# Altium PCB PCB1.PcbDoc
Units mm, origin at the board's own origin, x right, y up, seen from the top; angles counter-clockwise.
Board outline 87.46 x 36.45 mm, 2 copper layers (Top Layer, Bottom Layer); 50 components, 32 nets, 114 pads, 0 vias.
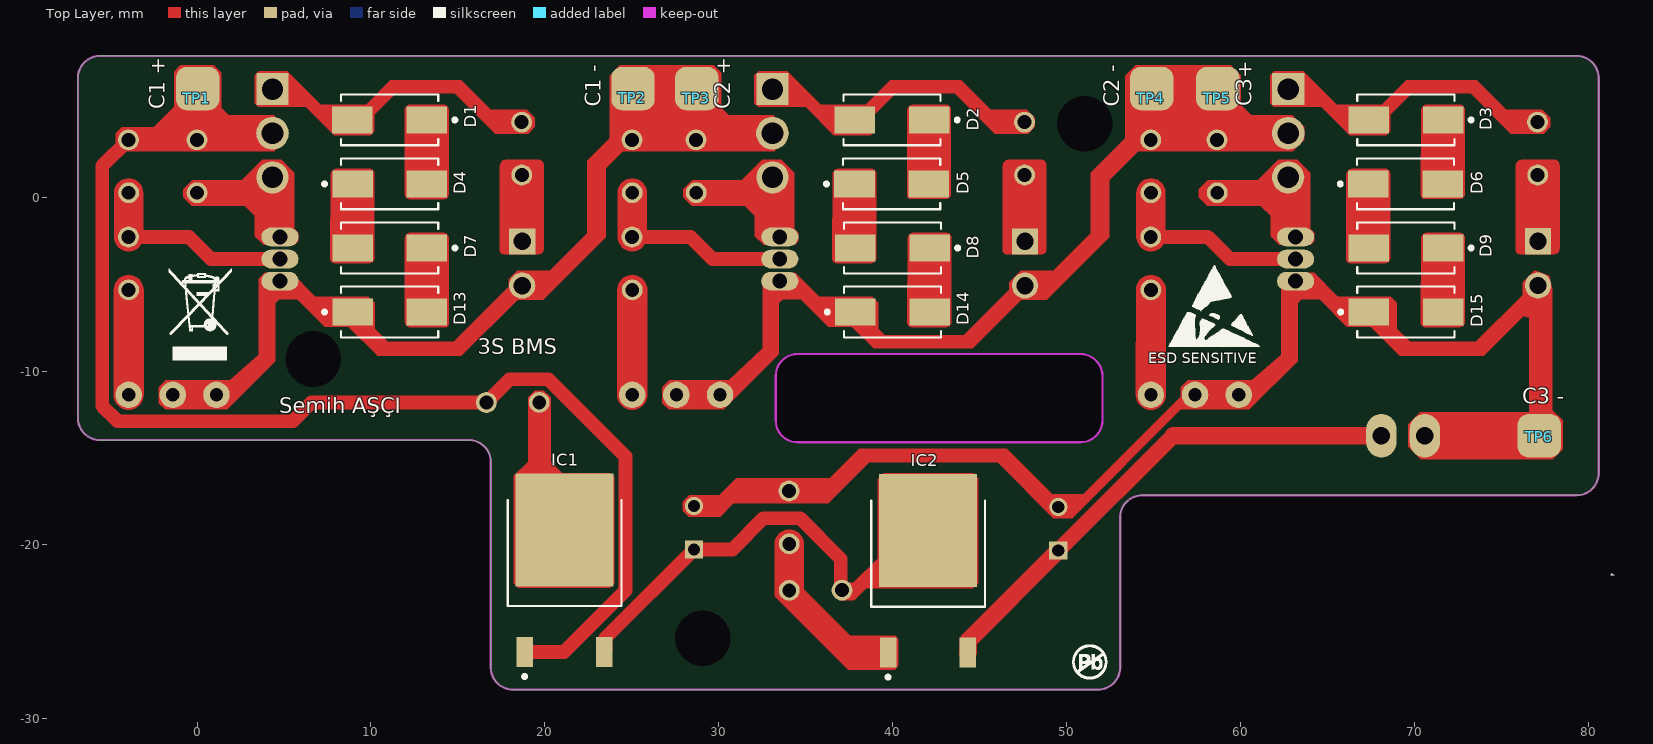
[diagram p0: Top Layer view]
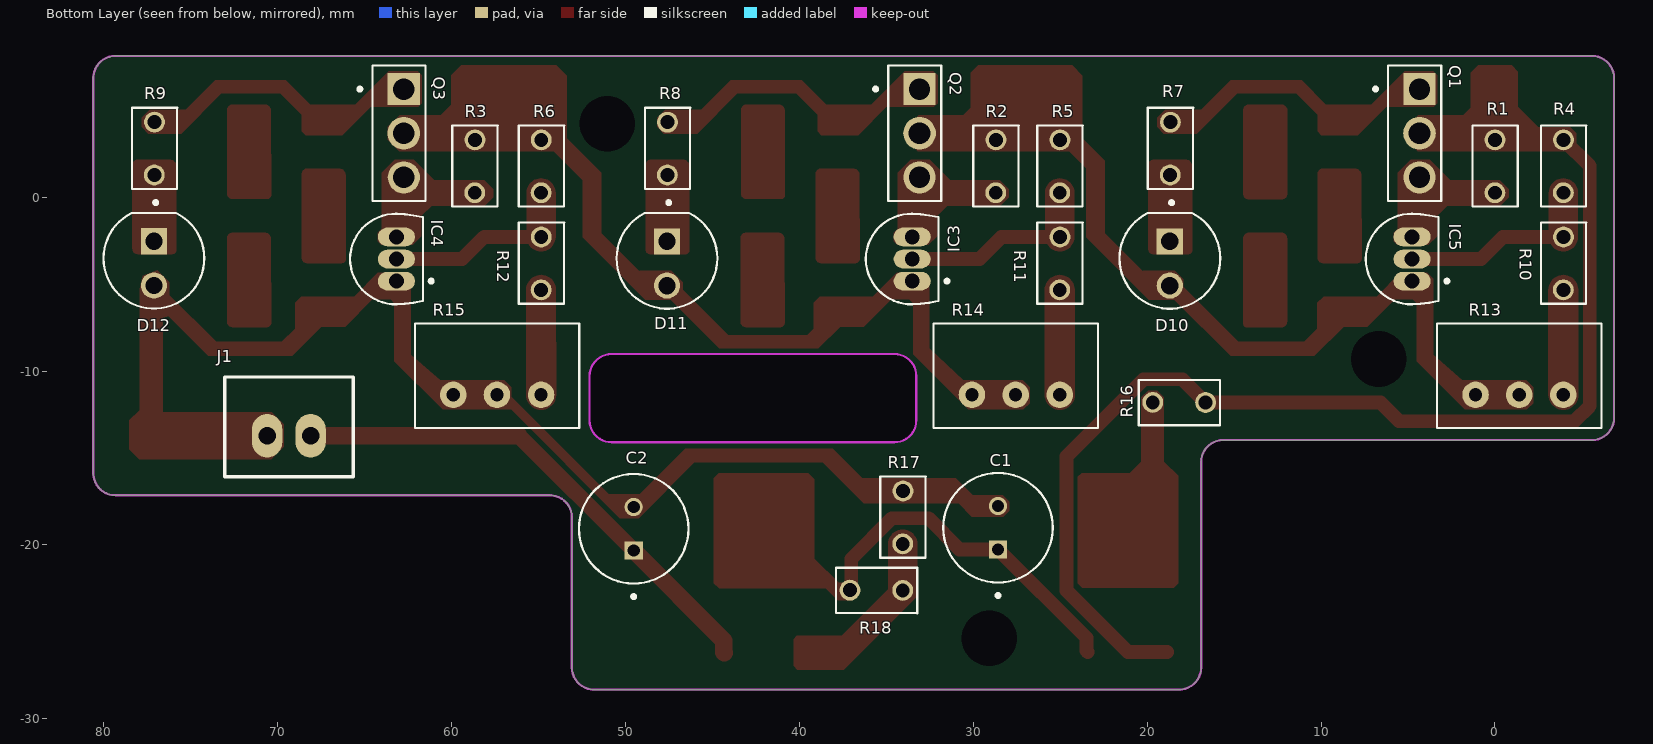
[diagram p1: Bottom Layer view, seen from below]
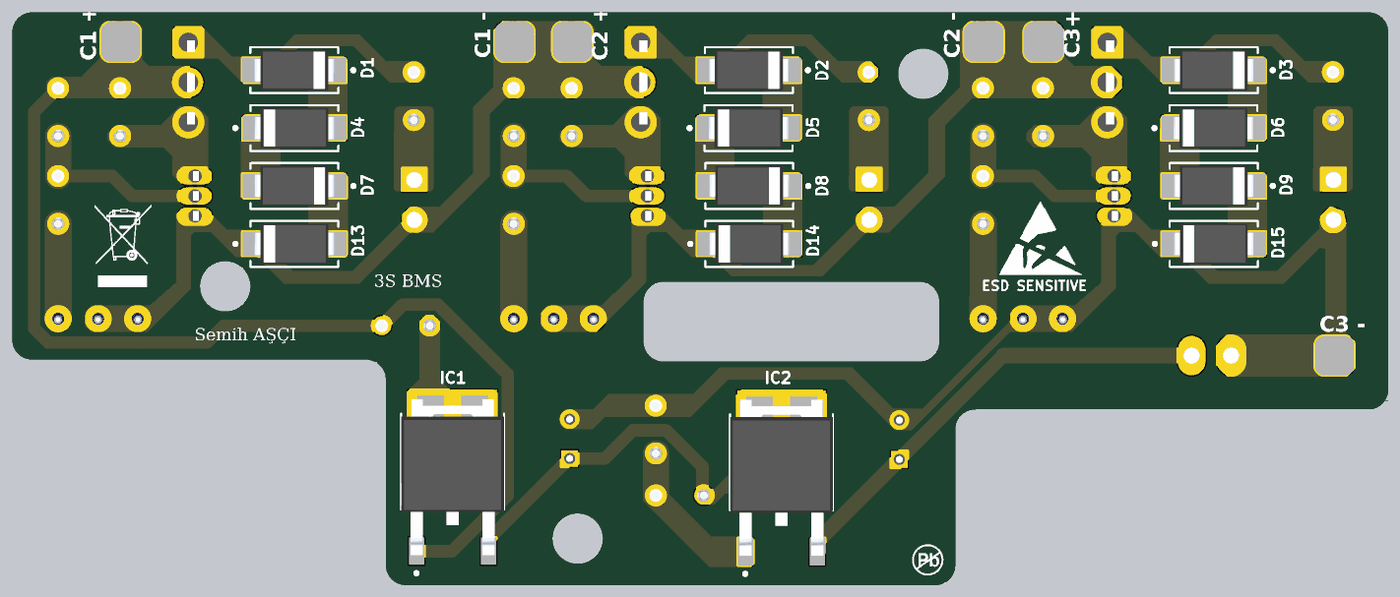
[diagram p2: 3D render of the assembled board from above, using the file's embedded part models]
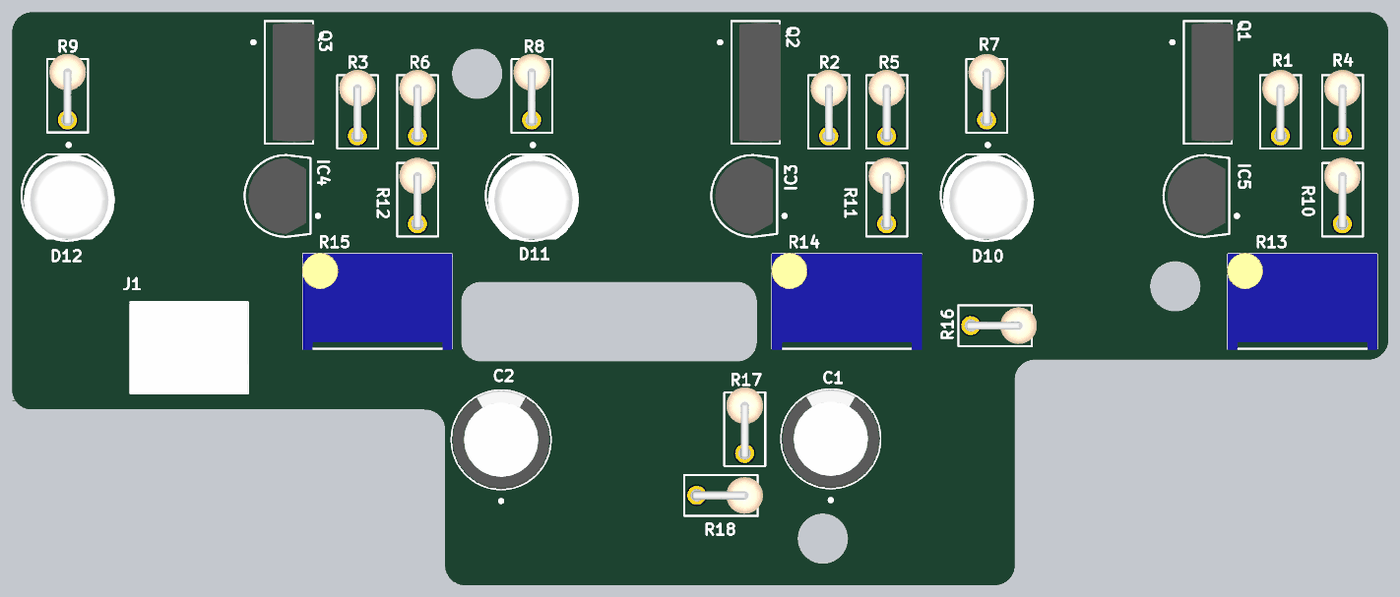
[diagram p3: 3D render of the assembled board from below, using the file's embedded part models]

## Layer stack, top to bottom
Top Solder: solder mask 0.0102, Solder Resist, Dk 3.5
Top Layer: signal copper 0.0356
Dielectric 1: dielectric 0.32, FR-4, Dk 4.8
Bottom Layer: signal copper 0.0356
Bottom Solder: solder mask 0.0102, Solder Resist, Dk 3.5

## Board outline
16.891,-27.051 16.891,-15.24 ccw(c15.621,-15.24) 15.621,-13.97 -5.588,-13.97 cw(c-5.588,-12.7) -6.858,-12.7 -6.858,6.858 cw(c-5.588,6.858) -5.588,8.128 79.337,8.128 cw(c79.337,6.858) 80.607,6.858 80.607,-15.875 cw(c79.337,-15.875) 79.337,-17.145 54.356,-17.145 ccw(c54.356,-18.415) 53.086,-18.415 53.086,-27.051 cw(c51.816,-27.051) 51.816,-28.321 22.733,-28.321 18.161,-28.321 cw(c18.161,-27.051)
cut-out: 50.8,-9.017 cw(c50.8,-10.287) 52.07,-10.287 52.07,-12.827 cw(c50.8,-12.827) 50.8,-14.097 34.544,-14.097 cw(c34.544,-12.827) 33.274,-12.827 33.274,-10.287 cw(c34.544,-10.287) 34.544,-9.017

## Design rules (kind name [scope] priority, off if disabled: settings)
Clearance [All] p1: gap=0.254 ignorepadtopadclearanceinfootprint=FALSE except(0: Arc-Hole Track-Hole SMDPad-Hole THPad-Hole Via-Hole Fill-Hole Poly-Hole Region-Hole Text-Hole)
PolygonConnect [All] p1: connectstyle=Relief reliefconductorwidth=0.254 reliefentries=4 polygonreliefangle="90 Angle" airgapwidth=0.254
RoutingVias [All] p1: holewidth=0.711 width=1.27 viastyle="Through Hole" minholewidth=0.711 minwidth=1.27 maxholewidth=0.711 maxwidth=1.27
SolderMaskExpansion [All] p1: expansion=0.102 istentingtop=FALSE
Width [All] p1: maxlimit=50 minlimit=0.254 preferedwidth=0.254 minimp=50.000000 maximp=50.000000 favimp=50.000000
30 further rules are at their usual default settings.

## Components (designator, comment, footprint, x,y, rotation, side; value= is the part's Value field where it differs from the comment)
C1 "493-15610-ND" AL_ELEC_CAP_RAD 28.575,-19.01 r90 bottom
C2 "493-15610-ND" AL_ELEC_CAP_RAD 49.53,-19.07 r90 bottom
D1 "1N4007 SMD" DO-214AC 11.07,4.445 r180 top
D2 "1N4007 SMD" DO-214AC 39.967,4.445 r180 top
D3 "1N4007 SMD" DO-214AC 69.52,4.445 r180 top
D4 "1N4007 SMD" DO-214AC 11.078,0.762 r0 top
D5 "1N4007 SMD" DO-214AC 39.943,0.762 r0 top
D6 "1N4007 SMD" DO-214AC 69.496,0.762 r0 top
D7 "1N4007 SMD" DO-214AC 11.078,-2.921 r180 top
D8 "1N4007 SMD" DO-214AC 39.991,-2.921 r180 top
D9 "1N4007 SMD" DO-214AC 69.52,-2.921 r180 top
D10 "LED TH" TH_LED 18.694,-3.814 r270 bottom
D11 "LED TH" TH_LED 47.614,-3.814 r270 bottom
D12 "LED TH" TH_LED 77.12,-3.809 r270 bottom
D13 "1N4007 SMD" DO-214AC 11.078,-6.604 r0 top
D14 "1N4007 SMD" DO-214AC 39.991,-6.604 r0 top
D15 "1N4007 SMD" DO-214AC 69.52,-6.604 r0 top
IC1 "497-1574-2-ND" TO-252-3 21.133,-21.459 r90 top
IC2 "497-1574-2-ND" TO-252-3 42.037,-21.497 r90 top
IC3 "TL431" TO92-3 34.088,-3.556 r90 bottom
IC4 "TL431" TO92-3 63.75,-3.556 r90 bottom
IC5 "TL431" TO92-3 5.335,-3.556 r90 bottom
J1 "B2B-XH-A(LF)(SN)" "JST XH B2B-XH-A" 69.362,-13.716 r0 bottom
Q1 "BD140" "TO126 (SOT32)" 4.641,3.679 r270 bottom
Q2 "BD140" "TO126 (SOT32)" 33.394,3.679 r270 bottom
Q3 "BD140" "TO126 (SOT32)" 63.055,3.679 r270 bottom
R1 "RES 1K OHM TH" TH_RES -0.005,1.778 r90 bottom
R2 "RES 1K OHM TH" TH_RES 28.702,1.778 r90 bottom
R3 "RES 1K OHM TH" TH_RES 58.664,1.778 r90 bottom
R4 "RES 20K OHM TH" TH_RES -3.942,1.778 r90 bottom
R5 "RES 20K OHM TH" TH_RES 25.019,1.778 r90 bottom
R6 "RES 20K OHM TH" TH_RES 54.849,1.778 r90 bottom
R7 "RES 330R OHM TH" TH_RES 18.669,2.794 r90 bottom
R8 "RES 330R OHM TH" TH_RES 47.59,2.794 r90 bottom
R9 "RES 330R OHM TH" TH_RES 77.095,2.799 r90 bottom
R10 "RES 20K OHM TH" TH_RES -3.942,-3.81 r90 bottom
R11 "RES 20K OHM TH" TH_RES 25.019,-3.81 r90 bottom
R12 "RES 20K OHM TH" TH_RES 54.849,-3.81 r90 bottom
R13 "TRIMPOT" Trimpot_tube -1.407,-10.287 r180 bottom
R14 "TRIMPOT" Trimpot_tube 27.554,-10.287 r180 bottom
R15 "TRIMPOT" Trimpot_tube 57.384,-10.287 r180 bottom
R16 "RES 2R OHM TH" TH_RES 18.157,-11.806 r180 bottom
R17 "RES 4.7K OHM TH" TH_RES 34.049,-18.419 r90 bottom
R18 "RES 517R OHM TH" TH_RES 35.574,-22.606 r180 bottom
TP1 "TEST PAD" TEST_PAD -0.006,5.711 r90 top
TP2 "TEST PAD" TEST_PAD 25.028,5.73 r90 top
TP3 "TEST PAD" TEST_PAD 28.701,5.711 r90 top
TP4 "TEST PAD" TEST_PAD 54.858,5.711 r90 top
TP5 "TEST PAD" TEST_PAD 58.663,5.711 r90 top
TP6 "TEST PAD" TEST_PAD 77.207,-13.752 r90 top

## Footprints (in the part's own frame and the unit in brackets; to place one, negate y for a bottom-side part, rotate by r counter-clockwise, add the part's x,y. Pads: shape width x height; smd on the part's side, far side on the other; paste and mask are expansions set on the pad)
AL_ELEC_CAP_RAD [mm]
  rect 1.05x1.05 hole 0.7: 1(-1.25,0)
  round 1.05 hole 0.7: 2(1.25,0)
  silkscreen extent -4,-3.15 3.15,3.15, body extent -3.15,-3.15 3.15,3.15, height 7
DO-214AC [mm]
  rect 2.33x1.55 smd: A(2.135,0) C(-2.135,0)
  silkscreen extent -3.85,-1.46 2.8,1.46, body extent -2.57,-1.28 2.57,1.28, height 2.62
"JST XH B2B-XH-A" [mm]
  oval 1.75x2.5 hole 1: 1(-1.25,0) 2(1.25,0)
  silkscreen extent -3.7,-3.38 3.7,2.38, body extent -3.7,-3.37 3.7,2.38, height 7
TEST_PAD [mm]
  rrect50% 0.2x0.2 smd: 1(-0.015,0.004)
  Top Layer region: 0.025,0.522 0.335,0.434 0.485,0.284 0.485,0.204 0.535,0.154 0.535,-0.236 0.277,-0.494 0.025,-0.494
  Top Layer region: -0.015,-0.504 -0.325,-0.416 -0.475,-0.266 -0.475,-0.186 -0.525,-0.136 -0.525,0.254 -0.267,0.512 -0.015,0.512
  Top Layer lines w0.254: 0.025,0.522 cw(c0.025,0.014) 0.025,-0.494 0.025,0.522 ; 0.035,0.522 ccw(c0.035,0.014) 0.035,-0.494 0.035,0.522
TH_LED [mm]
  round 1.508 hole 1: 1(1.27,0)
  rect 1.508x1.508 hole 1: 2(-1.27,0)
  silkscreen extent -3.6,-2.9 2.6,2.9, body extent -2.9,-2.76 2.51,3.04, height 12.1
TH_RES [mm]
  round 1.2 hole 0.8: 1(-1.52,0.005) 2(1.52,-0.005)
  silkscreen extent -2.32,-1.32 2.35,1.3, body extent -1.78,-1.17 2.69,1.16, height 8.84
TO92-3 [mm]
  oval 1.07x2.14 hole 0.85: 1(-1.27,-0.575) 2(0,-0.575) 3(1.27,-0.575)
  silkscreen extent -2.61,-2.67 2.61,2.09, body extent -2.41,-1.84 2.41,1.84, height 5.34
"TO126 (SOT32)" [mm]
  rect 1.85x1.85 hole 1.23: 1(-2.54,0.305)
  round 1.88 hole 1.25: 2(0,0.305)
  round 1.85 hole 1.23: 3(2.54,0.305)
  silkscreen extent -3.9,-2.32 3.9,1.56, body extent -3.8,-1 3.8,1.65, height 13.2
TO-252-3 [mm]
  rect 1.73x0.96 smd: 1(-4.7,2.285) 3(-4.7,-2.285)
  rect 6.49x5.63 smd paste-4: 4(2.32,0)
  silkscreen extent -6.2,-3.27 4.04,3.27, body extent -4.95,-3.27 4.95,3.27, height 2.55
Trimpot_tube [mil]
  round 60 hole 30: 1(-99.21,-42.52) 2(-0.39,-42.52) 3(99.61,-42.52)
  silkscreen extent -186,-118 186,119, body extent -189,-120 188,122, height 455

## Part data
C1 C2: library part "CAP 100uF Radial TH", "Cap Aluminum Lytic 100uF 16V 20% (6.3 X 11mm) Radial 2.5mm 175mA 2000h 105 Bulk", Capacitance=100uF, Case/Package=Radial, Leakage Current=48uA, Manufacturer=Nichicon, Manufacturer Part Number=UPJ1C101MED, Max Operating Temperature=105°C, Min Operating Temperature=-55°C, Package Quantity=200, Ripple Current=175mA, Tolerance=20%, Voltage Rating=16V, Category="Aluminum Electrolytic Capacitors", ComponentLink1Description=https://datasheet.ciiva.com/30527/getdatasheetpartid-513226-30527124.pdf?src-supplier=Verical, ComponentLink1URL=https://datasheet.ciiva.com/30527/getdatasheetpartid-513226-30527124.pdf?src-supplier=Verical, ComponentLink2Description=https://datasheet.ciiva.com/109/e-pj-109367.pdf?src-supplier=Digi-Key, ComponentLink2URL=https://datasheet.ciiva.com/109/e-pj-109367.pdf?src-supplier=Digi-Key, ComponentLink3Description=https://datasheet.ciiva.com/11686/e-pj-11686584.pdf?src-supplier=Avnet, ComponentLink3URL=https://datasheet.ciiva.com/11686/e-pj-11686584.pdf?src-supplier=Avnet, ComponentLink4Description=https://datasheet.ciiva.com/16389/e-pj-16389048.pdf?src-supplier=Future+Electronics, ComponentLink4URL=https://datasheet.ciiva.com/16389/e-pj-16389048.pdf?src-supplier=Future+Electronics, Construction=RADIAL, Designed by="Semih AŞÇI", Diameter=6.3mm, Dissipation Factor=0.16%, Height=11mm, Height - Seated (Max)=0.472inch, Lead Diameter=0.5mm, Lead Free="Lead Free", Lead Pitch=2.5mm, Lead/Base Style=Straight, Length=16mm, Life (Hours)=2000Hour, Mount="Through Hole", Packaging=Bulk, Pricing 1="1=0,40000, 10=0,27700, 50=0,19360, 100=0,16590, 500=0,12446, 1000=0,10510, 2500=0,09957, 5000=0,09404 (USD)", Radiation Hardening=No, RoHS=Yes, RoHS Compliant=Yes, Series=PJ, Stock 1=86, Supplier 1=Digi-Key, Supplier Part Number 1=493-15610-ND, Termination=Radial, Voltage Rating (DC)=16V, Impedance=550mR
D1 D2 D3 D4 D5 D6 D7 D8 D9 D13 D14 D15: "VR=1000V IF=1A 15pF", Average Rectified Current=1A, Capacitance=15pF, Case/Package=DO-214AC, Forward Voltage=1.1V, Manufacturer="ON Semiconductor / Fairchild", Manufacturer Part Number=1N4007, Max Forward Surge Current (Ifsm)=30A, Max Operating Temperature=175°C, Max Repetitive Reverse Voltage (Vrrm)=1kV, Max Reverse Current=5uA, Min Operating Temperature=-65°C, Package Quantity=1000, Power Dissipation=3W, Supplier Part Number 1=1467514, Category="Rectifier Diodes", ComponentLink1Description=https://datasheet.ciiva.com/1239/1n4005-1239313.pdf?src-supplier=Newark, ComponentLink1URL=https://datasheet.ciiva.com/1239/1n4005-1239313.pdf?src-supplier=Newark, ComponentLink2Description=https://datasheet.ciiva.com/927/1n4001-d-927427.pdf?src-supplier=Digi-Key, ComponentLink2URL=https://datasheet.ciiva.com/927/1n4001-d-927427.pdf?src-supplier=Digi-Key, ComponentLink3Description=https://datasheet.ciiva.com/910/1n4001-910362.pdf?src-supplier=Digi-Key, ComponentLink3URL=https://datasheet.ciiva.com/910/1n4001-910362.pdf?src-supplier=Digi-Key, ComponentLink4Description=https://datasheet.ciiva.com/910/1n4001-910361.pdf?src-supplier=Digi-Key, ComponentLink4URL=https://datasheet.ciiva.com/910/1n4001-910361.pdf?src-supplier=Digi-Key, Contact Plating=Tin,Matte, Current Rating=1A, Diameter=2.72mm, Element Configuration=Single, Forward Current=1A, Height=5.2mm, Lead Free="Lead Free", Length=5.2mm, Max Reverse Voltage (DC)=1kV, Max Surge Current=30A, Number of Pins=2, Output Current=1A, Packaging="Tape and Reel", Peak Non-Repetitive Surge Current=30A, Polarity=Standard, Pricing 1="1=0,17200, 10=0,16000, 100=0,05560, 500=0,04900, 1000=0,03000, 2500=0,01440 (EUR)", Radiation Hardening=No, Reach SVHC Compliant="No SVHC", Reverse Voltage=1kV, RoHS=Yes, RoHS Compliant=Yes, Series=-, Supplier 1=Farnell, Voltage Rating (DC)=1kV, Weight=0.245g, Width=2.72mm
D10 D11 D12: "Radial red led", Designed by="Semih AŞÇI"
IC1 IC2: library part LM317, "Reg Standard Lin Adj Pos 1.2V to 37V 0.2A 3-Pin (2+Tab) DPAK T/R", Case/Package=TO-252, Manufacturer=STMicroelectronics, Manufacturer Part Number=LM317MDT-TR, Max Operating Temperature=125°C, Max Output Current=200mA, Max Output Voltage=37V, Max Input Voltage=40V, Min Operating Temperature=0°C, Min Output Voltage=1.2V, Min Input Voltage=4.2V, Output Current=500mA, Package Quantity=1, Power Supply Rejection Ratio (PSRR)=80dB, Reference Voltage=1.3V, Supplier Part Number 1=2296022, Category="Voltage Regulators - Linear", ComponentLink1Description=https://datasheet.ciiva.com/41440/001185006-da-01-en-ic-reg-ldo-adj-lm317mdt-tr-to-252-3-stm-41440182.pdf?src-supplier=Conrad, ComponentLink1URL=https://datasheet.ciiva.com/41440/001185006-da-01-en-ic-reg-ldo-adj-lm317mdt-tr-to-252-3-stm-41440182.pdf?src-supplier=Conrad, Contact Plating=Tin,Matte, Height=2.4mm, Lead Free="Lead Free", Length=6.6mm, Mount="Surface Mount", Number of Outputs=1, Number of Pins=3, Number of Regulators=1, Output Type=Adjustable, Output Voltage=37V, Packaging="Tape and Reel", Polarity=Positive, Pricing 1="5=1,24000, 10=1,05000, 100=0,80700, 500=0,71400 (EUR)", Radiation Hardening=No, Reach SVHC Compliant="No SVHC", RoHS=Yes, Series=LM317, Stock 1=21391, Supplier 1=Farnell, Weight=0.063493oz, Width=6.2mm
J1: "CONN HEADER VERT 2POS 2.5MM", Current Rating (Amps)=3A, Manufacturer="JST Sales America Inc.", Material Flammability Rating="UL94 V-0", Operating Temperature="-25°C ~ 85°C", Supplier Part Number 1=455-2247-ND, Voltage Rating=250V, Insulation Color=Natural, ComponentLink1Description=Datasheet, ComponentLink1URL=http://www.jst-mfg.com/product/pdf/eng/eXH.pdf, ComponentLink2Description="DigiKey Link", ComponentLink2URL=http://digikey.com/product-detail/en/jst-sales-america-inc/B2B-XH-A-LF-SN/455-2247-ND/1651045, Connector Type=Header, Contact Finish - Mating=Tin, Contact Finish - Post=Tin, Contact Length - Post="0.134\" (3.40mm)", Contact Material=Brass, Contact Shape=Square, Contact Type="Male Pin", Fastening Type="Detent Lock", LastUpdated="12.01.2020 23:46:08", Lifecycle Status=Active, Minimum Order=1, Mounting Type="Through Hole", Number of Positions=2, Number of Positions Loaded=All, Number of Rows=1, Packaging=Bulk, Part Number=B2B-XH-A(LF)(SN), Part Status=Active, PartId=67, Pitch - Mating="0.098\" (2.50mm)", Price=0.15, Series=XH, Shrouding="Shrouded - 4 Wall", Style="Board to Cable/Wire", Supplier 1=DigiKey, Termination="Press-Fit, Solder", Insulation Height="0.276\" (7.00mm)", Insulation Material="Polyamide (PA66), Nylon 6/6"
Q1 Q2 Q3: "Trans GP BJT PNP 80V 1.5A 1250mW 3-Pin(3+Tab) SOT-32 Tube / TRANS PNP 80V 1.5A SOT-32", Case/Package=TO-126-3, Collector Base Voltage (VCBO)=-80V, Collector Emitter Breakdown Voltage=80V, Collector Emitter Saturation Voltage=500mV, Emitter Base Voltage (VEBO)=-5V, Manufacturer="ON Semiconductor / Fairchild", Max Breakdown Voltage=100V, Max Collector Current=1.5A, Max Operating Temperature=150°C, Max Power Dissipation=1.25W, Min Operating Temperature=-55°C, Package Quantity=500, Supplier Part Number 1=BD140OS-ND, Category=BJTs, Collector Emitter Voltage (VCEO)=500mV, ComponentLink1Description=https://datasheet.ciiva.com/985/bd136-d-985528.pdf?src-supplier=Digi-Key, ComponentLink1URL=https://datasheet.ciiva.com/985/bd136-d-985528.pdf?src-supplier=Digi-Key, Designed by="Semih AŞÇI", Element Configuration=Single, hFE Min=25, Manufacturer Part Number=BD140, Mount="Through Hole", Number of Pins=3, Packaging=Bulk, Polarity=PNP, RoHS=No, RoHS Compliant=No, Supplier 1=Digi-Key
R1 R2 R3: "Res 1k Ohm TH", Resistance=1k, Designed by="Semih AŞÇI"
R4 R5 R6 R10 R11 R12: "Res 20K Ohm  TH", Resistance=20k, Designed by="Semih AŞÇI"
R7 R8 R9: "Res 330R Ohm  TH", Resistance=330R, Designed by="Semih AŞÇI"
R13 R14 R15: "20k trimpot", Designed by="Semih AŞÇI"
R16: "Res 2R Ohm 1W TH", Resistance=2R, Designed by="Semih AŞÇI"
R17: "Res 4.7K Ohm  TH", Resistance=4.7k, Designed by="Semih AŞÇI"
R18: "Res 517R Ohm  TH", Resistance=517R, Designed by="Semih AŞÇI"

## Free pads (board coordinates)
  rrect50% 2.5x2.5 smd: 4(0.035,6.246) 5(25.069,6.246) 6(28.742,6.246) 7(54.899,6.246) 8(58.704,6.246) 9(77.193,-13.717)
  round 0 hole 3.2 unplated mask+0.2: NPTH(6.68,-9.309) NPTH(29.083,-25.362) NPTH(51.054,4.216)

## Nets (pads, with @x,y where several pads share a name; then routed paths per layer and width w, separated by ;. In a path a pad name is that pad's centre, name@x,y a point inside that pad or via, vN(x,y) a via of type N, cw(c..) or ccw(c..) an arc to the next point about the centre after c; other vN are vias at no path point)
+: C2.1 IC2.3 J1.1 | length 29.4
  Top Layer w0.9: C2.1 56.134,-13.716 56.147,-13.716
  Top Layer w1: IC2.3 44.342,-26.177 44.342,-25.508 C2.1 ; 56.147,-13.716 J1.1
-: C1.2 C2.2 D12.1 D15.C IC4.1 J1.2 pad.9 R15.1 R15.2 R17.2 TP6.1
CELL1+: IC1.1 pad.4 Q1.2 R1.2 R4.2 R16.2 TP1.1 | length 64.2
  Top Layer w0.8: R4.2 -5.457,1.788 -5.457,-11.995 -4.568,-12.884 5.513,-12.884 6.586,-11.811 R16.2 17.977,-10.471 20.21,-10.471 24.644,-14.906 24.644,-22.612 21.098,-26.159 IC1.1
CELL1-: D10.1 D13.C IC5.1 pad.5 pad.6 Q2.2 R2.2 R5.2 R13.1 R13.2 TP2.1 TP3.1
CELL2-: D11.1 D14.C IC3.1 pad.7 pad.8 Q3.2 R3.2 R6.2 R14.1 R14.2 TP4.1 TP5.1
NetC1_1: C1.1 IC1.3 IC2.4 R18.1 | length 20.1
  Top Layer w0.8: IC1.3 23.498,-26.079 23.498,-25.337 C1.1 30.789,-20.26 32.585,-18.463 34.675,-18.463 37.017,-20.806 37.017,-22.524 R18.1 R18.1@37.171,-22.524
NetD1_A: D1.A Q1.1 R7.2
NetD1_C: D1.C D4.A
NetD2_A: D2.A Q2.1 R8.2
NetD2_C: D2.C D5.A
NetD3_A: D3.A Q3.1 R9.2
NetD3_C: D3.C D6.A
NetD4_C: D4.C D7.A
NetD5_C: D5.C D8.A
NetD6_C: D6.C D9.A
NetD7_C: D7.C D13.A
NetD8_C: D8.C D14.A
NetD9_C: D9.C D15.A
NetD10_2: D10.2 R7.1
NetD11_2: D11.2 R8.1
NetD12_2: D12.2 R9.1
NetQ1_3: IC5.3 Q1.3 R1.1
NetQ2_3: IC3.3 Q2.3 R2.1
NetQ3_3: IC4.3 Q3.3 R3.1
NetR4_1: IC5.2 R4.1 R10.2 | length 9.2
  Top Layer w0.8: R10.2 -0.476,-2.29 0.79,-3.556 IC5.2
NetR5_1: IC3.2 R5.1 R11.2 | length 9
  Top Layer w0.8: R11.2 28.381,-2.29 29.647,-3.556 IC3.2
NetR6_1: IC4.2 R6.1 R12.2 | length 8.9
  Top Layer w0.8: R12.2 58.127,-2.29 59.393,-3.556 IC4.2
NetR10_1: R10.1 R13.3
NetR11_1: R11.1 R14.3
NetR12_1: R12.1 R15.3
NetR16_1: IC1.4 R16.1
NetR17_1: IC2.1 R17.1 R18.2

## Keep-outs
Keep-Out Layer:
  lines w0.127: -6.858,-12.7 ccw(c-5.588,-12.7) -5.588,-13.97 15.621,-13.97 cw(c15.621,-15.24) 16.891,-15.24 16.891,-27.051 ccw(c18.161,-27.051) 18.161,-28.321 22.733,-28.321 51.816,-28.321 ccw(c51.816,-27.051) 53.086,-27.051 53.086,-21.59 53.086,-18.415 cw(c54.356,-18.415) 54.356,-17.145 75.819,-17.145 79.337,-17.145 ccw(c79.337,-15.875) 80.607,-15.875 80.607,6.858 ccw(c79.337,6.858) 79.337,8.128 76.124,8.128 -5.588,8.128 ccw(c-5.588,6.858) -6.858,6.858 -6.858,-11.176 -6.858,-12.7 ; 33.274,-12.827 ccw(c34.544,-12.827) 34.544,-14.097 50.8,-14.097 ccw(c50.8,-12.827) 52.07,-12.827 52.07,-10.287 ccw(c50.8,-10.287) 50.8,-9.017 34.544,-9.017 ccw(c34.544,-10.287) 33.274,-10.287 33.274,-11.684 33.274,-12.827

## Other copper
Top Layer:
  region net NetR17_1: 33.223,-22.949 37.44,-27.165 40.119,-27.165 40.335,-26.949 40.335,-25.425 40.145,-25.235 37.569,-25.235 34.887,-22.553 34.883,-22.553 ccw(c34.049,-22.47) 34.887,-22.47 34.887,-19.943 ccw(c34.062,-19.943) 34.062,-19.118 34.049,-19.118 ccw(c34.049,-19.943) 33.223,-19.943 33.223,-22.483 ccw(c34.049,-22.483) 33.228,-22.564 33.223,-22.564
  region net NetR10_1: -4.803,-11.328 -4.803,-11.367 ccw(c-3.94,-11.367) -3.94,-12.23 ccw(c-3.94,-11.367) -3.076,-11.367 -3.076,-5.334 ccw(c-3.94,-5.334) -3.94,-4.47 ccw(c-3.94,-5.321) -4.791,-5.321
  region net NetR11_1: 24.158,-11.328 24.158,-11.367 ccw(c25.021,-11.367) 25.021,-12.23 ccw(c25.021,-11.367) 25.885,-11.367 25.885,-5.334 ccw(c25.021,-5.334) 25.021,-4.47 ccw(c25.021,-5.321) 24.17,-5.321
  region net NetR12_1: 53.988,-11.328 53.988,-11.367 ccw(c54.851,-11.367) 54.851,-12.23 ccw(c54.851,-11.367) 55.715,-11.367 55.715,-5.334 ccw(c54.851,-5.334) 54.851,-4.47 ccw(c54.851,-5.321) 54,-5.321
  region net NetR6_1: 54.023,0.254 cw(c54.849,0.254) 54.849,1.079 54.862,1.079 cw(c54.862,0.254) 55.687,0.254 55.687,-2.273 cw(c54.849,-2.273) 54.849,-3.111 cw(c54.849,-2.286) 54.023,-2.286
  region net NetR4_1: -4.768,0.254 cw(c-3.942,0.254) -3.942,1.079 -3.929,1.079 cw(c-3.929,0.254) -3.104,0.254 -3.104,-2.273 cw(c-3.942,-2.273) -3.942,-3.111 cw(c-3.942,-2.286) -4.768,-2.286
  region net NetR5_1: 24.194,0.254 cw(c25.019,0.254) 25.019,1.079 25.032,1.079 cw(c25.032,0.254) 25.857,0.254 25.857,-2.273 cw(c25.019,-2.273) 25.019,-3.111 cw(c25.019,-2.286) 24.194,-2.286
  region net NetD10_2: 17.414,1.655 17.414,1.795 cw(c17.77,1.795) 17.77,2.15 19.624,2.15 cw(c19.624,1.846) 19.929,1.846 19.929,-2.98 cw(c19.637,-2.98) 19.637,-3.273 17.63,-3.273 cw(c17.63,-3.044) 17.402,-3.044
  region net NetD11_2: 46.335,1.655 46.335,1.795 cw(c46.691,1.795) 46.691,2.15 48.545,2.15 cw(c48.545,1.846) 48.85,1.846 48.85,-2.98 cw(c48.558,-2.98) 48.558,-3.273 46.551,-3.273 cw(c46.551,-3.044) 46.322,-3.044
  region net NetD12_2: 75.841,1.66 75.841,1.8 cw(c76.197,1.8) 76.197,2.156 78.051,2.156 cw(c78.051,1.851) 78.356,1.851 78.356,-2.975 cw(c78.063,-2.975) 78.063,-3.267 76.057,-3.267 cw(c76.057,-3.039) 75.828,-3.039
  region net NetD9_C: 70.395,-2.54 70.395,-2.4 cw(c70.751,-2.4) 70.751,-2.045 72.605,-2.045 cw(c72.605,-2.349) 72.91,-2.349 72.91,-7.175 cw(c72.618,-7.175) 72.618,-7.468 70.611,-7.468 cw(c70.611,-7.239) 70.383,-7.239
  region net NetD6_C: 66.101,1.143 66.101,1.283 cw(c66.457,1.283) 66.457,1.638 68.311,1.638 cw(c68.311,1.333) 68.616,1.333 68.616,-3.492 cw(c68.324,-3.492) 68.324,-3.785 66.317,-3.785 cw(c66.317,-3.556) 66.089,-3.556
  region net NetD3_C: 70.395,4.826 70.395,4.966 cw(c70.751,4.966) 70.751,5.321 72.605,5.321 cw(c72.605,5.016) 72.91,5.016 72.91,0.191 cw(c72.618,0.191) 72.618,-0.102 70.611,-0.102 cw(c70.611,0.127) 70.383,0.127
  region net NetD8_C: 40.866,-2.54 40.866,-2.4 cw(c41.222,-2.4) 41.222,-2.045 43.076,-2.045 cw(c43.076,-2.349) 43.381,-2.349 43.381,-7.175 cw(c43.089,-7.175) 43.089,-7.468 41.082,-7.468 cw(c41.082,-7.239) 40.854,-7.239
  region net NetD5_C: 36.548,1.143 36.548,1.283 cw(c36.904,1.283) 36.904,1.638 38.758,1.638 cw(c38.758,1.333) 39.063,1.333 39.063,-3.492 cw(c38.771,-3.492) 38.771,-3.785 36.764,-3.785 cw(c36.764,-3.556) 36.536,-3.556
  region net NetD2_C: 40.842,4.826 40.842,4.966 cw(c41.198,4.966) 41.198,5.321 43.052,5.321 cw(c43.052,5.016) 43.357,5.016 43.357,0.191 cw(c43.065,0.191) 43.065,-0.102 41.058,-0.102 cw(c41.058,0.127) 40.83,0.127
  region net NetD1_C: 11.938,4.724 11.938,4.966 cw(c12.294,4.966) 12.294,5.321 14.16,5.321 cw(c14.16,5.016) 14.465,5.016 14.465,0.178 cw(c14.173,0.178) 14.173,-0.114 12.255,-0.114 cw(c12.255,0.191) 11.951,0.191
  region net NetD4_C: 7.683,1.143 7.683,1.283 cw(c8.039,1.283) 8.039,1.638 9.893,1.638 cw(c9.893,1.333) 10.198,1.333 10.198,-3.492 cw(c9.906,-3.492) 9.906,-3.785 7.899,-3.785 cw(c7.899,-3.556) 7.671,-3.556
  region net NetD7_C: 11.938,-2.413 cw(c12.319,-2.413) 12.319,-2.032 14.097,-2.032 cw(c14.097,-2.413) 14.478,-2.413 14.478,-7.239 cw(c14.224,-7.239) 14.224,-7.493 12.319,-7.493 cw(c12.319,-7.112) 11.938,-7.112
  region net NetC1_1: 39.497,-15.862 44.628,-15.862 44.92,-16.154 44.92,-22.2 44.615,-22.504 38.481,-22.504 37.795,-23.19 36.995,-23.19 36.551,-22.746 36.551,-22.416 36.779,-22.187 37.744,-22.187 39.141,-20.79 39.141,-16.218
  region net -: 27.927,-18.034 28.283,-18.39 30.074,-18.39 30.848,-17.615 36.297,-17.615 38.659,-15.253 46.05,-15.253 49.251,-18.453 50.33,-18.453 56.578,-12.205 60.518,-12.205 63.287,-9.436 63.287,-6.096 63.515,-5.867 64.557,-5.867 66.132,-7.442 67.49,-7.442 69.18,-9.131 73.993,-9.131 76.282,-6.842 76.606,-6.933 76.606,-12.37 70.345,-12.37 69.659,-13.056 69.659,-14.338 70.383,-15.062 77.978,-15.062 78.537,-14.503 78.537,-12.84 77.947,-12.25 77.947,-5.296 77.765,-4.52 76.939,-4.202 76.238,-4.902 76.238,-5.629 73.548,-8.319 69.764,-8.319 69.002,-7.556 69.002,-6.071 68.646,-5.715 65.598,-5.715 64.239,-4.356 62.69,-4.356 62.347,-4.699 62.347,-9.068 60.658,-10.528 56.988,-10.528 56.581,-10.935 56.581,-11.491 50.978,-17.094 49.187,-17.094 46.558,-14.465 38.087,-14.465 36.398,-16.154 31.013,-16.154 30.036,-17.132 28.308,-17.132 27.927,-17.513
  region net NetR16_1: 23.736,-22.466 23.99,-22.212 23.99,-16.091 23.774,-15.875 20.993,-15.875 20.333,-15.215 20.333,-11.519 19.939,-11.125 19.406,-11.125 19.037,-11.493 19.037,-15.202 18.225,-16.015 18.225,-22.212 18.479,-22.466
  region net CELL2-: 54.138,2.652 54.148,2.642 63.017,2.642 63.678,3.302 63.678,4.039 62.992,4.724 60.617,4.724 60.02,5.321 60.02,7.005 59.444,7.582 57.526,7.582 53.97,7.582 53.386,6.998 53.386,3.404 53.388,3.401 51.389,1.402 51.389,-2.083 49.218,-4.255 49.179,-4.216 47.376,-4.216 46.711,-4.882 46.711,-5.326 44.099,-7.938 39.553,-7.938 39.172,-7.556 39.172,-6.071 38.816,-5.715 35.768,-5.715 34.409,-4.356 32.86,-4.356 32.517,-4.699 32.517,-8.687 30.582,-10.528 27.158,-10.528 26.751,-10.935 26.751,-11.836 27.12,-12.205 30.29,-12.205 33.457,-9.037 33.457,-6.096 33.685,-5.867 34.727,-5.867 36.302,-7.442 37.661,-7.442 38.905,-8.687 44.607,-8.687 47.401,-5.893 48.875,-5.893 52.456,-2.311 52.456,0.97
  region net CELL1-: -2.21,-11.836 -1.841,-12.205 1.727,-12.205 4.496,-9.436 4.496,-6.096 4.724,-5.867 5.766,-5.867 7.341,-7.442 8.7,-7.442 10.389,-9.131 15.202,-9.131 18.44,-5.893 19.914,-5.893 23.495,-2.311 23.495,1.651 24.486,2.642 33.198,2.642 33.96,3.404 33.96,3.912 33.147,4.724 30.582,4.724 30.15,5.156 30.15,7.15 29.718,7.582 27.864,7.582 24.308,7.582 23.724,6.998 23.724,3.404 22.428,2.108 22.428,-2.083 20.257,-4.255 20.218,-4.216 18.415,-4.216 17.92,-4.712 17.92,-5.156 14.757,-8.319 10.973,-8.319 10.211,-7.556 10.211,-6.071 9.855,-5.715 6.807,-5.715 5.448,-4.356 3.899,-4.356 3.556,-4.699 3.556,-9.068 1.867,-10.528 -1.803,-10.528 -2.21,-10.935
  region net CELL1+: 0.965,7.582 1.397,7.15 1.397,5.156 1.829,4.724 4.394,4.724 5.207,3.912 5.207,3.404 4.445,2.642 -4.267,2.642 -4.686,3.061 -4.686,3.67 -4.331,4.026 -2.489,4.026 -1.321,5.194 -1.321,7.226 -0.965,7.582 -0.889,7.582
  region net NetD3_A: 61.717,7.01 61.958,7.252 63.609,7.252 65.54,5.321 68.13,5.321 69.527,6.718 73.604,6.718 75.293,5.029 77.363,5.029 77.833,4.559 77.833,4.039 77.452,3.658 75.547,3.658 73.236,5.969 69.845,5.969 68.613,4.737 68.613,3.785 68.397,3.569 66.289,3.569 64.663,5.194 61.933,5.194 61.717,5.41
  region net NetD2_A: 32.055,7.01 32.296,7.252 33.947,7.252 35.878,5.321 38.469,5.321 39.866,6.718 43.942,6.718 45.631,5.029 47.701,5.029 48.171,4.559 48.171,4.039 47.79,3.658 45.885,3.658 43.574,5.969 40.183,5.969 38.951,4.737 38.951,3.785 38.735,3.569 36.627,3.569 35.001,5.194 32.271,5.194 32.055,5.41
  region net NetD1_A: 3.302,7.01 3.543,7.252 5.194,7.252 7.125,5.321 9.716,5.321 11.112,6.718 15.189,6.718 16.878,5.029 18.948,5.029 19.418,4.559 19.418,4.039 19.037,3.658 17.132,3.658 14.821,5.969 11.43,5.969 10.198,4.737 10.198,3.785 9.982,3.569 7.874,3.569 6.248,5.194 3.518,5.194 3.302,5.41
  region net NetQ3_3: 57.615,0.457 58.135,0.978 60.993,0.978 62.174,2.159 63.266,2.159 64.015,1.41 64.015,-1.829 64.244,-2.057 64.244,-2.54 64.041,-2.743 62.25,-2.743 61.742,-2.235 61.742,-1.079 61.145,-0.483 58.097,-0.483 57.615,0
  region net NetQ1_3: -0.8,0.457 -0.28,0.978 2.578,0.978 3.759,2.159 4.851,2.159 5.6,1.41 5.6,-1.829 5.829,-2.057 5.829,-2.54 5.626,-2.743 3.835,-2.743 3.327,-2.235 3.327,-1.079 2.73,-0.483 -0.318,-0.483 -0.8,0
  region net NetQ2_3: 27.953,0.457 28.473,0.978 31.331,0.978 32.512,2.159 33.604,2.159 34.354,1.41 34.354,-1.829 34.582,-2.057 34.582,-2.54 34.379,-2.743 32.588,-2.743 32.08,-2.235 32.08,-1.079 31.483,-0.483 28.435,-0.483 27.953,0

## Silkscreen, mask and mechanical layers (free items; w line width, h text height)
Top Overlay:
  drawing of 3172 lines, arcs and shapes, not listed
  text "C3+" at 60.973,5.234 h1.52 r90
  text "C1 -" at 23.52,5.208 h1.52 r90
  text "C2 -" at 53.353,5.208 h1.52 r90
  text "C1 +" at -1.549,5.055 h1.52 r90
  text "C2 +" at 30.975,5.055 h1.52 r90
  text "3S BMS" at 16.142,-9.335 h1.52
  text "ESD SENSITIVE" at 54.699,-9.56 h0.61
  text "C3 -" at 76.226,-12.185 h1.52
  text "Semih AŞÇI" at 4.724,-12.743 h1.52